# EAGLE board MiniPS-1d1 (EAGLE 5.06)
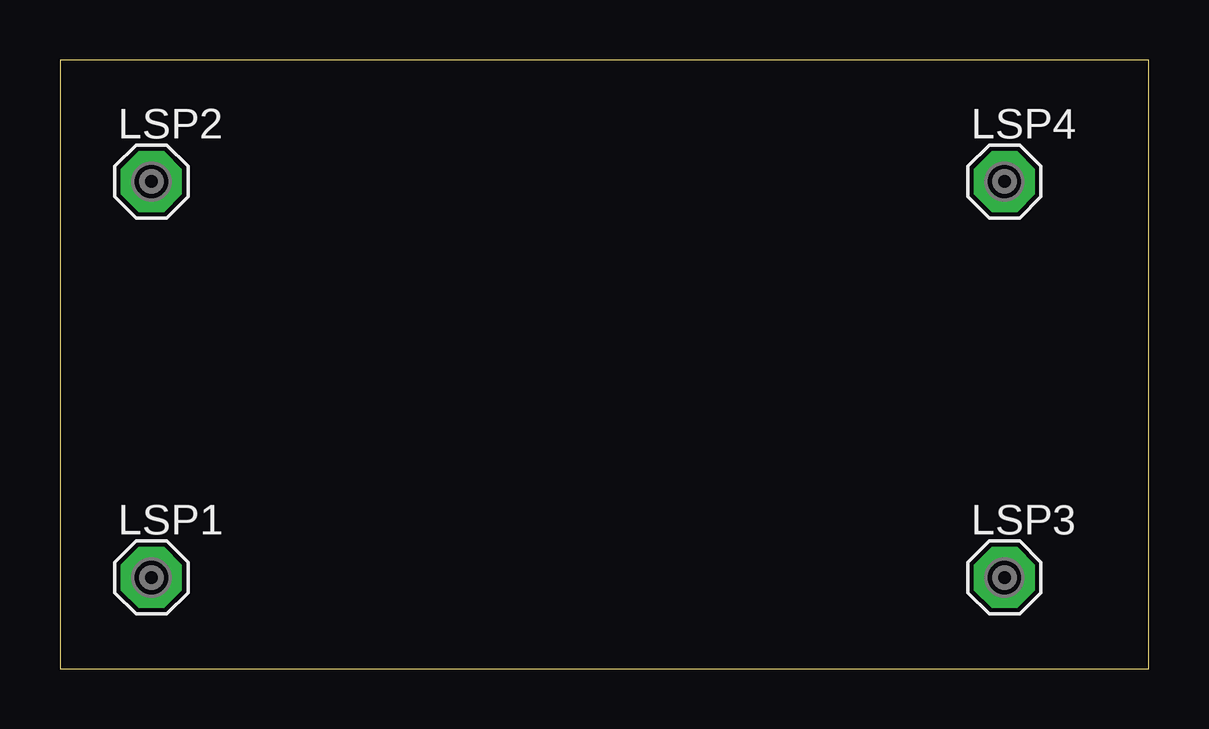
[diagram p0: board, top side]
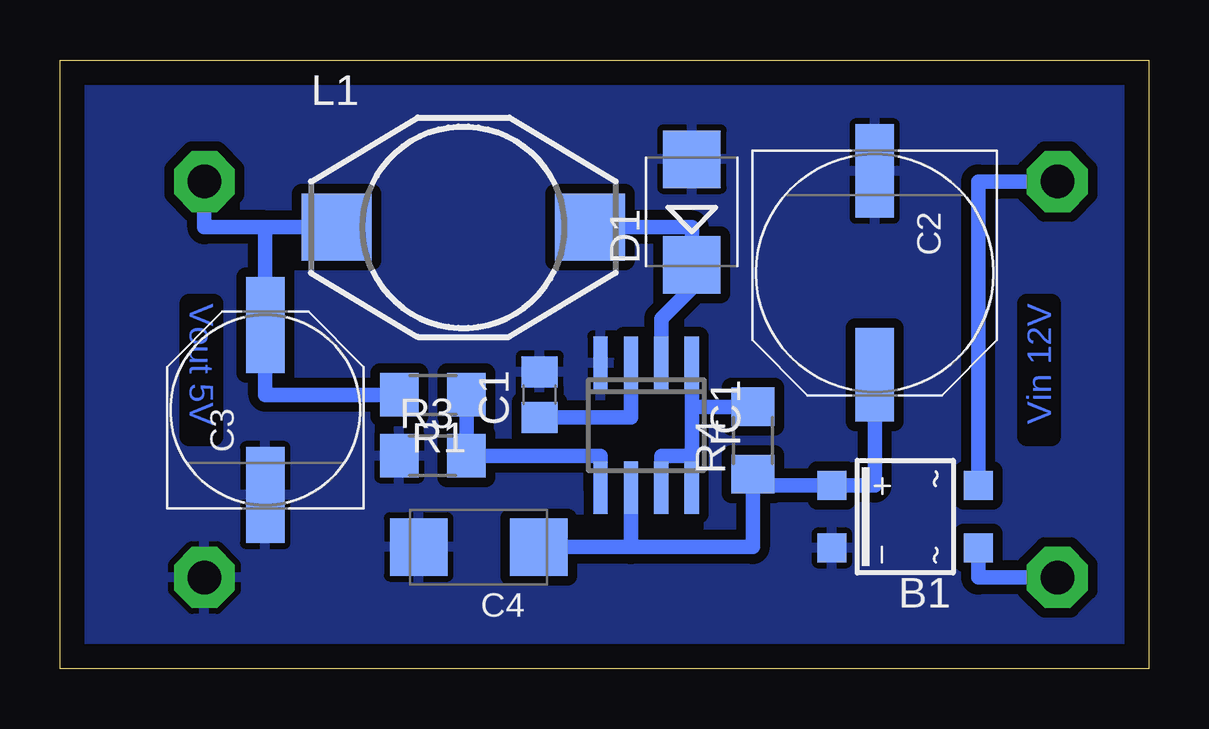
[diagram p1: board, bottom side, seen from below]

Size 45.39 x 25.39 mm. Coordinates in mm from the lower left corner, seen from the top.
Outline: 0,0 45.39,0 45.39,25.39 0,25.39 0,0
Copper layers (1*16): Top 0.035mm / dielectric 1.5mm / Bottom 0.035mm
Design rules "default": minimum track width 10mil, minimum drill 24mil, track to track 8mil, track to pad 8mil, pad to pad 8mil, via to via 8mil, smd to smd 8mil, copper to edge 40mil, drill to drill 8mil, minimum pad ring 10mil, minimum via ring 8mil, stop-mask expansion 4mil, vias tented up to drill 0mil, thermal gap 10mil

## Footprints (pad centres in the part's own frame; a part is rotated, then mirrored left to right if it is on the bottom)
SOIC-4 = smd 1.2 x 1.2: + 1.3,3.05; - -1.3,3.05; ~1 -1.3,-3.05; ~2 1.3,-3.05
C0805 = smd 1.3 x 1.5: 1 -0.95,0; 2 0.95,0
PANASONIC_G = smd 3.9 x 1.6: + 4.25,0; - -4.25,0
PANASONIC_F = smd 4 x 1.6: + 3.55,0; - -3.55,0
SMC_C = smd 2.4 x 2.4: + -2.5,0; - 2.5,0
SMB = smd 2.4 x 2.4: A 2.2,0; C -2.2,0
SOIC8 = smd 0.6 x 2.2: 1 -1.905,-2.6; 2 -0.635,-2.6; 3 0.635,-2.6; 4 1.905,-2.6; 5 1.905,2.6; 6 0.635,2.6; 7 -0.635,2.6; 8 -1.905,2.6
DO3316P = smd 2.92 x 2.79: 1 -5.28,0; 2 5.28,0
SE14 = drill 1.397 pad 2.54 octagon: MP 0,0
R1206 = smd 1.6 x 1.8: 1 -1.4,0; 2 1.4,0

## Placement (x,y rotation side)
B1  MB2S  [SOIC-4]  10.16,6.35 90 bottom
C1  [C0805]  25.4,11.43 90 bottom
C2  [PANASONIC_G]  11.43,16.51 270 bottom
C3  [PANASONIC_F]  36.83,10.79 90 bottom
C4  [SMC_C]  27.94,5.08 180 bottom
D1  [SMB]  19.05,19.05 90 bottom
IC1  MC34063AD  [SOIC8]  20.95,10.16 180 bottom
L1  [DO3316P]  28.57,18.41 0 bottom
LSP1  SE14  [SE14]  3.81,3.81 0 top
LSP2  SE14  [SE14]  3.81,20.32 0 top
LSP3  SE14  [SE14]  39.37,3.81 0 top
LSP4  SE14  [SE14]  39.37,20.32 0 top
R1  [R1206]  29.84,11.43 180 bottom
R3  [R1206]  29.84,8.89 0 bottom
R4  [R1206]  16.51,9.53 90 bottom

## Library data of the parts
B1 = rectifier
C1-C4 R1 R3 R4 = rcl
D1 = diode
IC1 = mc34063
L1 = inductor-coilcraft
LSP1-LSP4 = solpad

## Nets
GND: B1.- C1.2 C2.- C3.- C4.- D1.A IC1.4 LSP3.MP R3.1
N$1: C3.+ L1.1 LSP4.MP R1.2
N$2: B1.+ C2.+ C4.+ IC1.6 R4.1
N$3: B1.~2 LSP2.MP
N$4: B1.~1 LSP1.MP
N$7: IC1.5 R1.1 R3.2
N$8: C1.1 IC1.3
N$9: D1.C IC1.2 L1.2
N$10: IC1.1 IC1.7 IC1.8 R4.2

## Tracks (layer width: path | path; a pad name or v marks a point on that pad's centre or on a via)
GND
  pour Bottom (isolate 0.406): -1.27,26.67 46.99,26.67 46.99,-1.27 -1.27,-1.27
N$1
  Bottom 0.61: 36.83,18.41 L1.1 | 36.83,18.41 39.37,18.41 LSP4.MP | 36.83,18.41 C3.+ 36.83,11.43 R1.2
N$2
  Bottom 0.61: C2.+ 11.43,7.65 B1.+ 16.51,7.65 | 16.51,7.65 R4.1 | 21.59,5.08 16.51,5.08 16.51,7.65 | 21.59,5.08 C4.+ | 21.59,5.08 IC1.6
N$3
  Bottom 0.61: B1.~2 7.11,20.32 LSP2.MP
N$4
  Bottom 0.61: B1.~1 7.11,3.81 LSP1.MP
N$7
  Bottom 0.61: R1.1 R3.2 22.86,8.89 IC1.5
N$8
  Bottom 0.61: C1.1 21.59,10.48 IC1.3
N$9
  Bottom 0.61: IC1.2 20.32,14.61 19.05,15.88 D1.C 19.05,18.41 L1.2
N$10
  Bottom 0.61: IC1.8 19.05,8.89 | 19.05,8.89 19.05,10.79 | 19.05,10.79 19.05,11.43 | 19.05,11.43 IC1.1 | IC1.7 20.32,8.89 19.05,8.89 | 19.05,11.43 19.05,11.56 | R4.2 19.05,10.93 19.05,10.79

## Text on the board
Bottom: Vin 12V | Vout 5V